# Altium PCB PowerBoard.PcbDoc
Units mm, origin at the board's own origin, x right, y up, seen from the top; angles counter-clockwise.
Board outline 36 x 20 mm, 4 copper layers (Top Layer, Layer 1, Layer 2, Bottom Layer), stack 0.888 mm thick; 25 components, 18 nets, 82 pads, 31 vias.
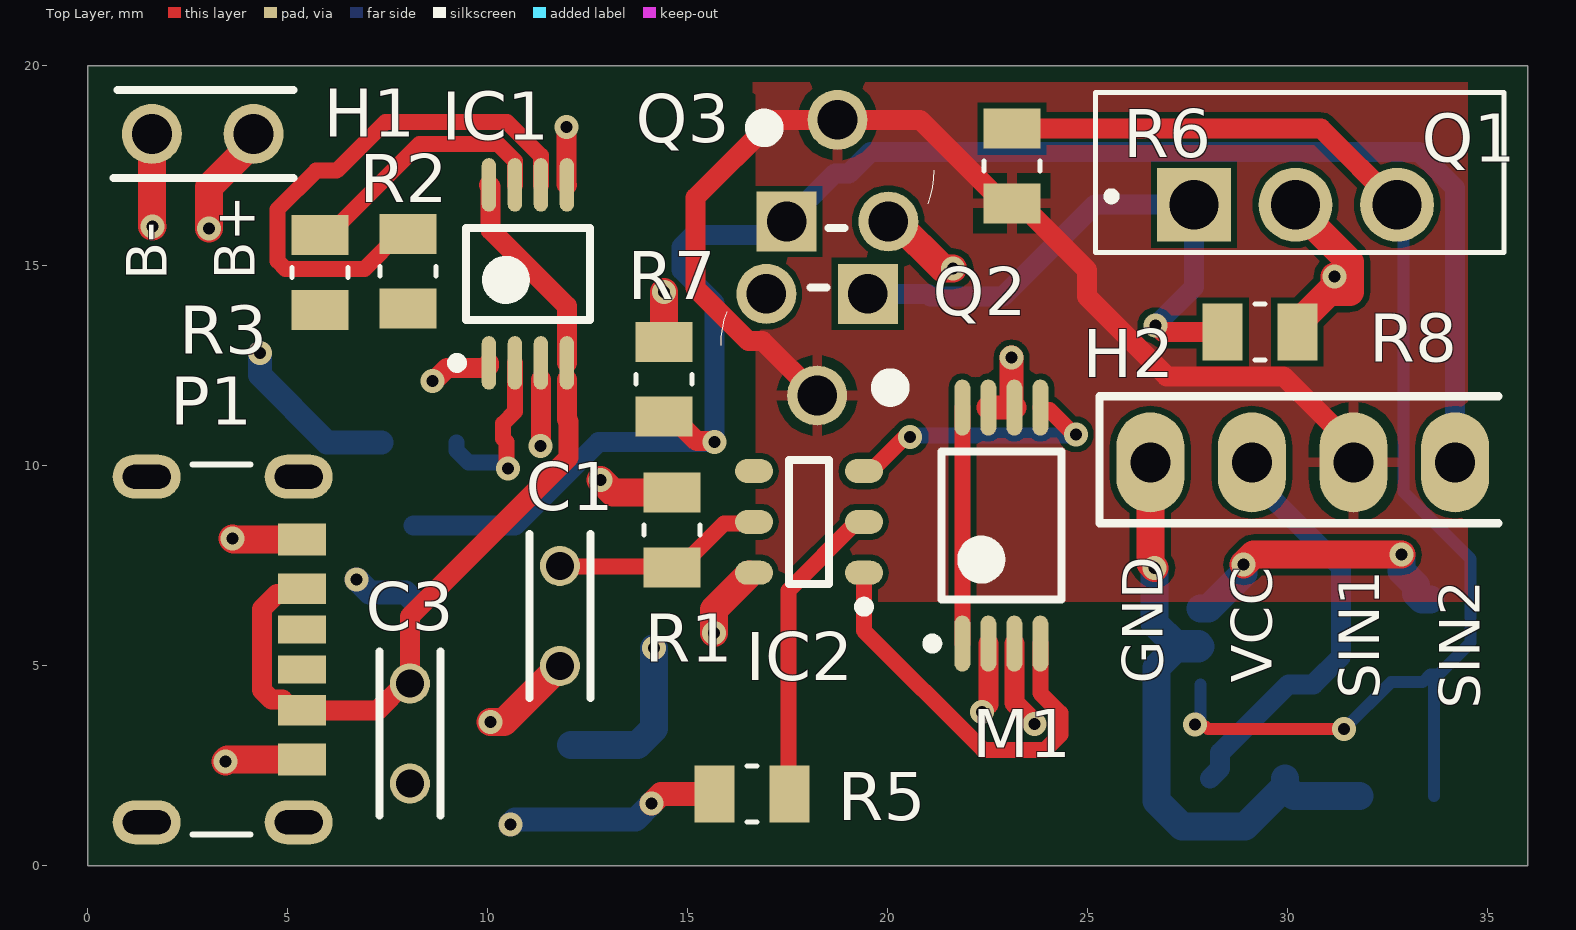
[diagram p0: Top Layer view]
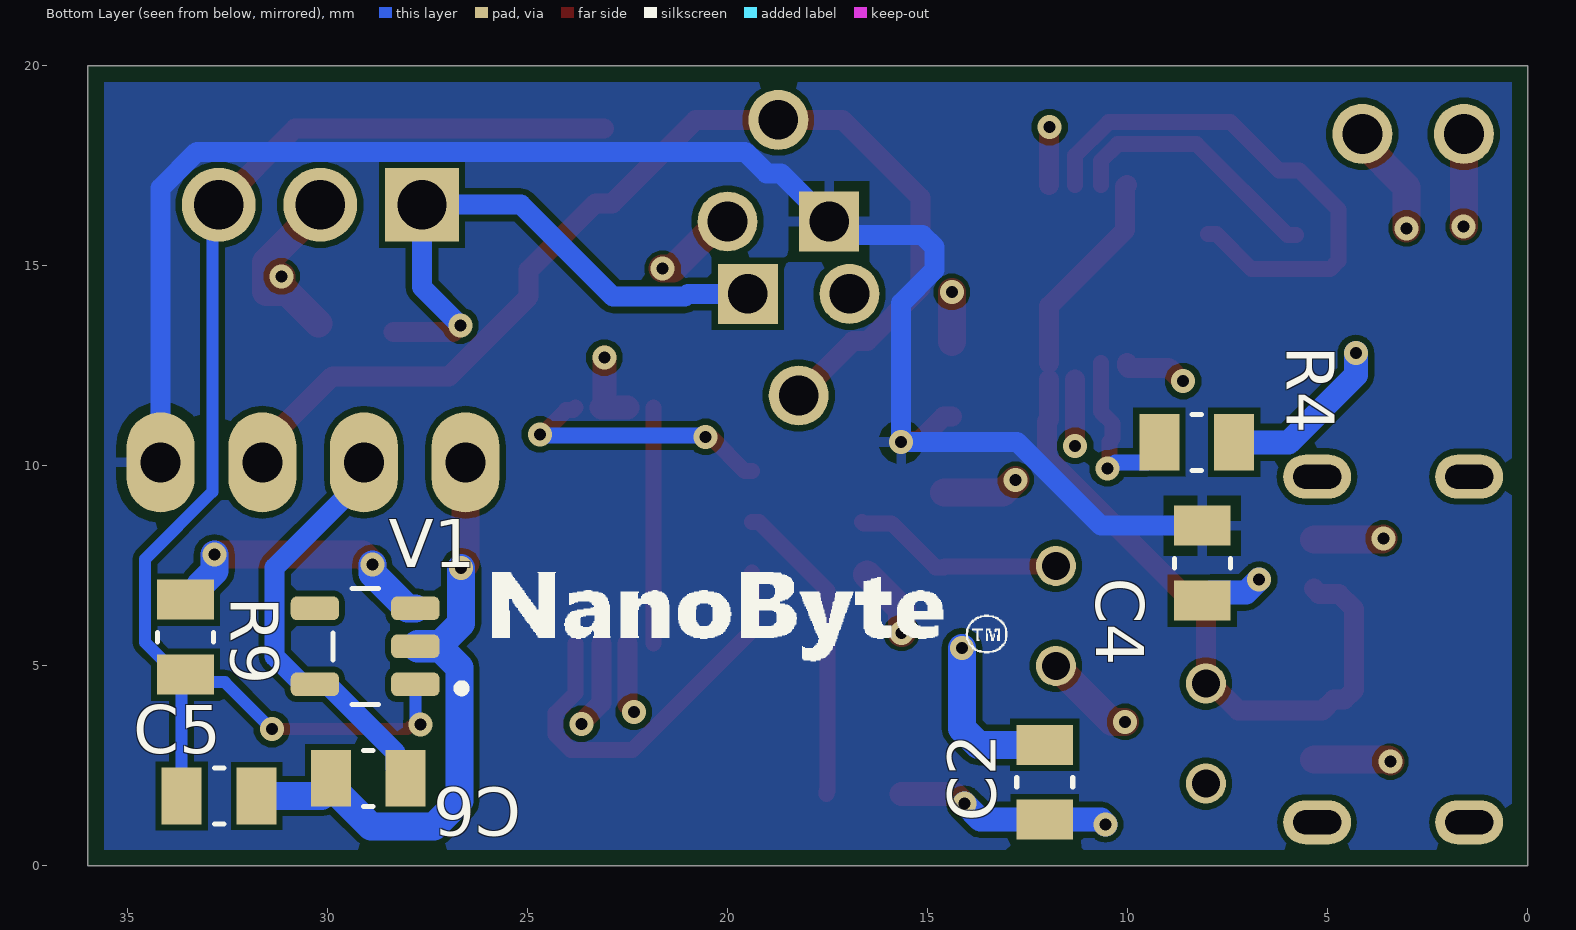
[diagram p1: Bottom Layer view, seen from below]
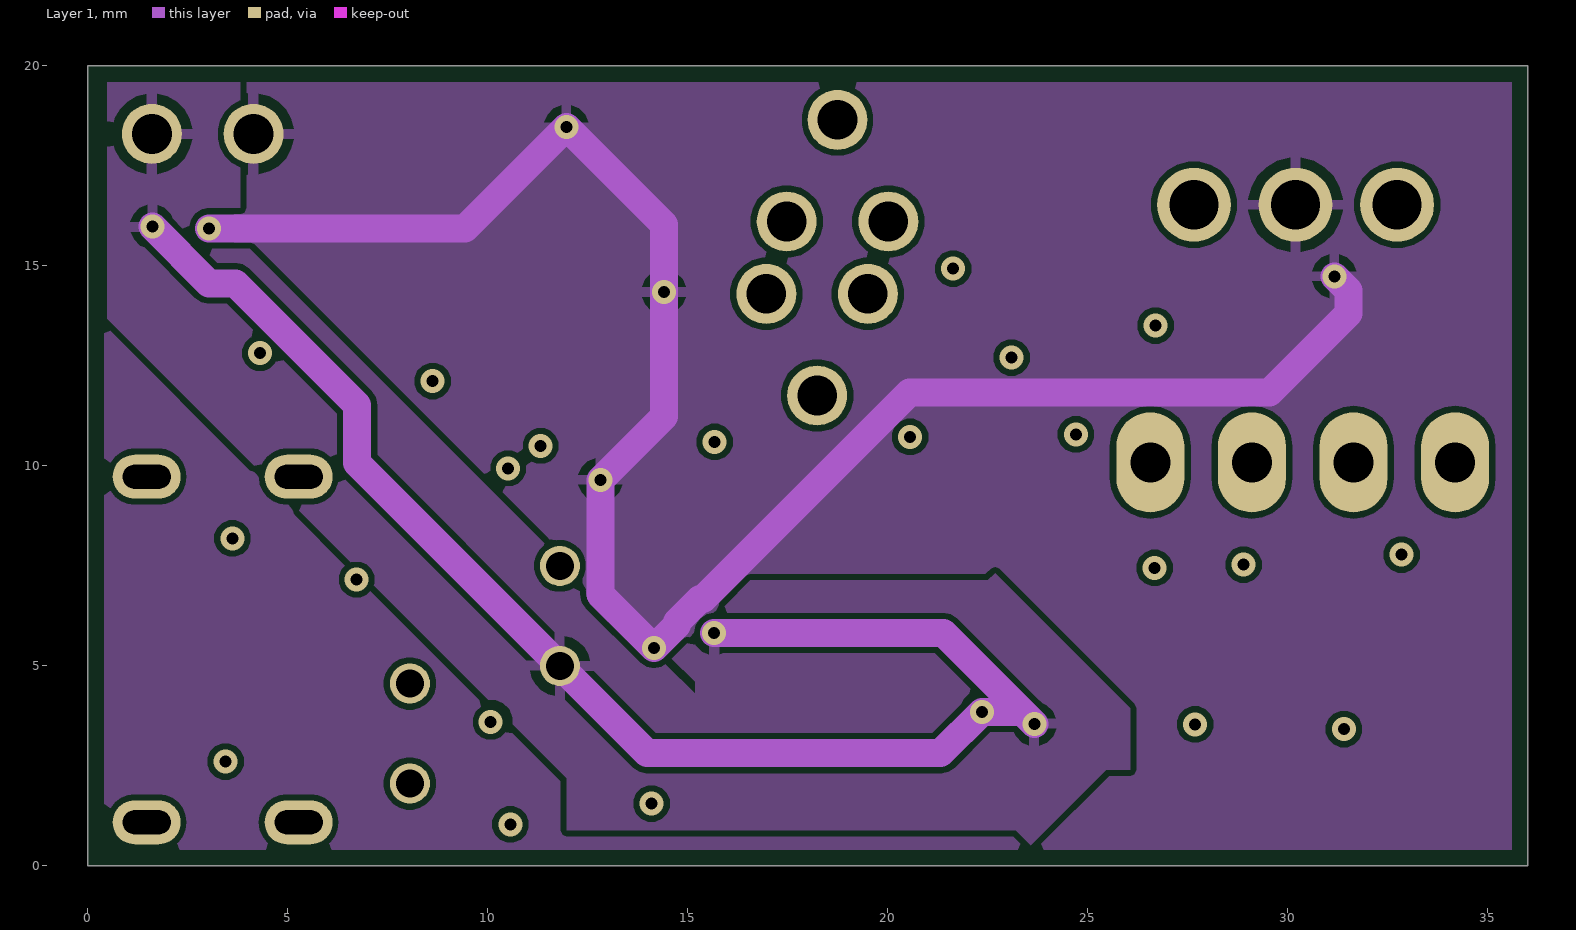
[diagram p2: Layer 1]
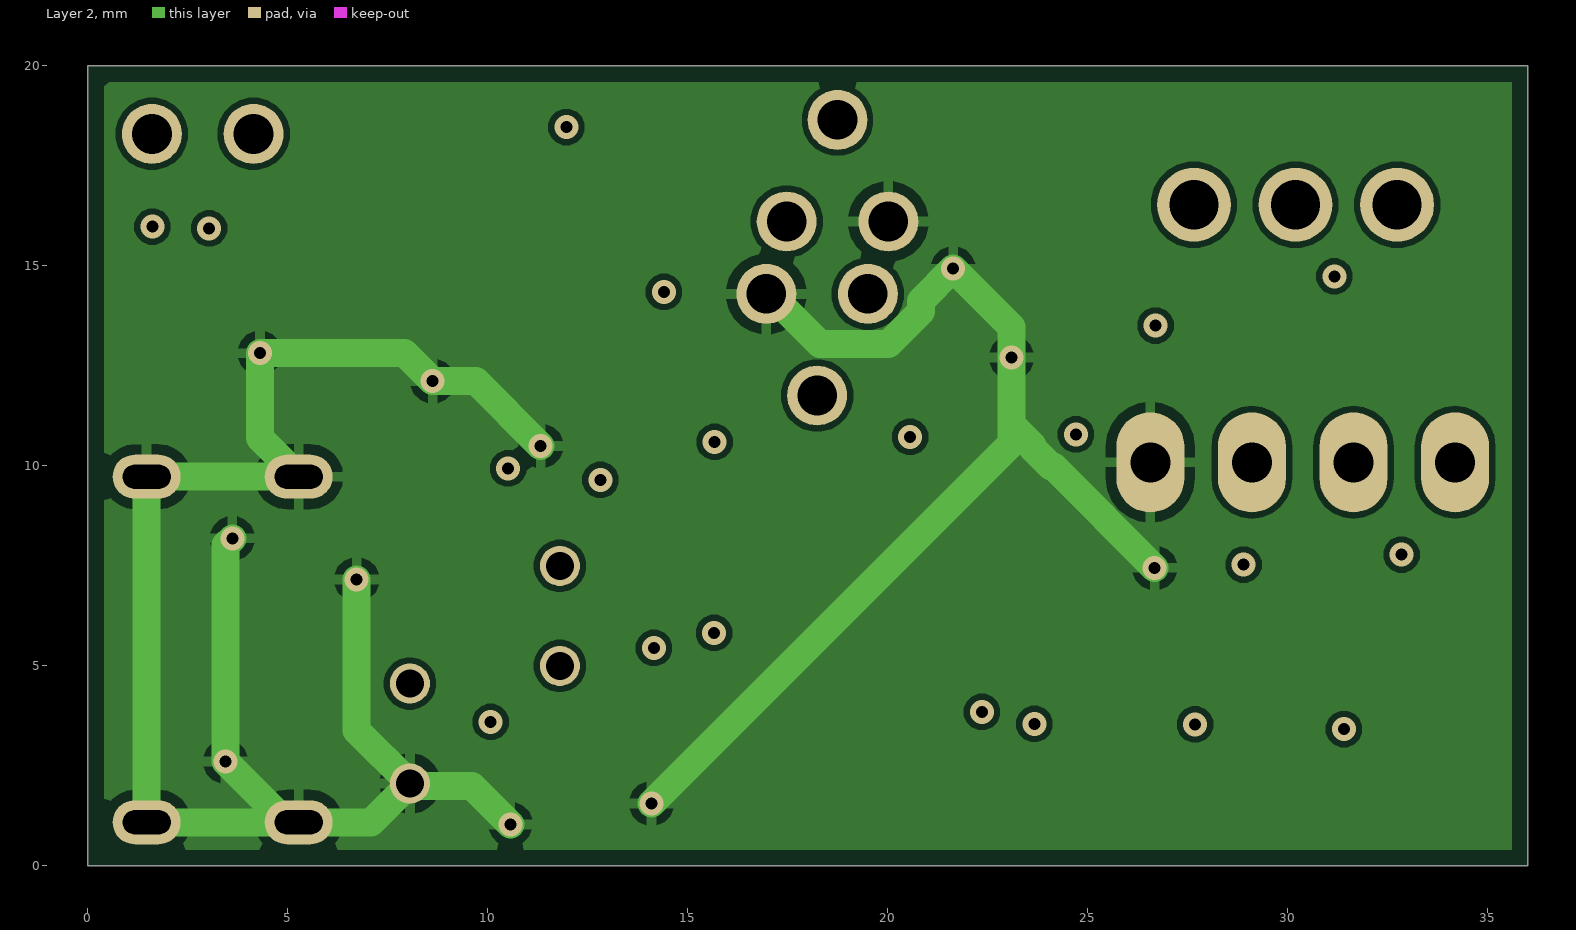
[diagram p3: Layer 2]
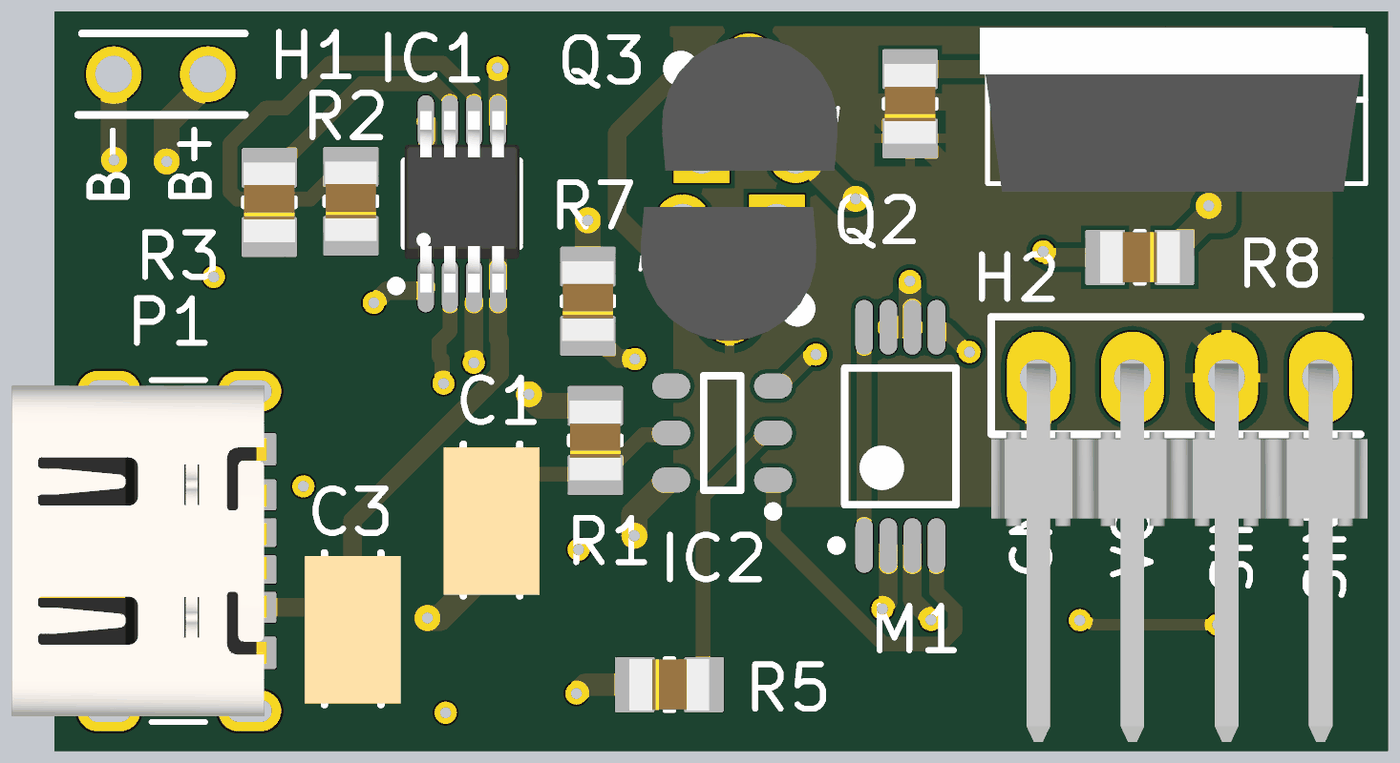
[diagram p4: 3D render of the assembled board from above, using the file's embedded part models]
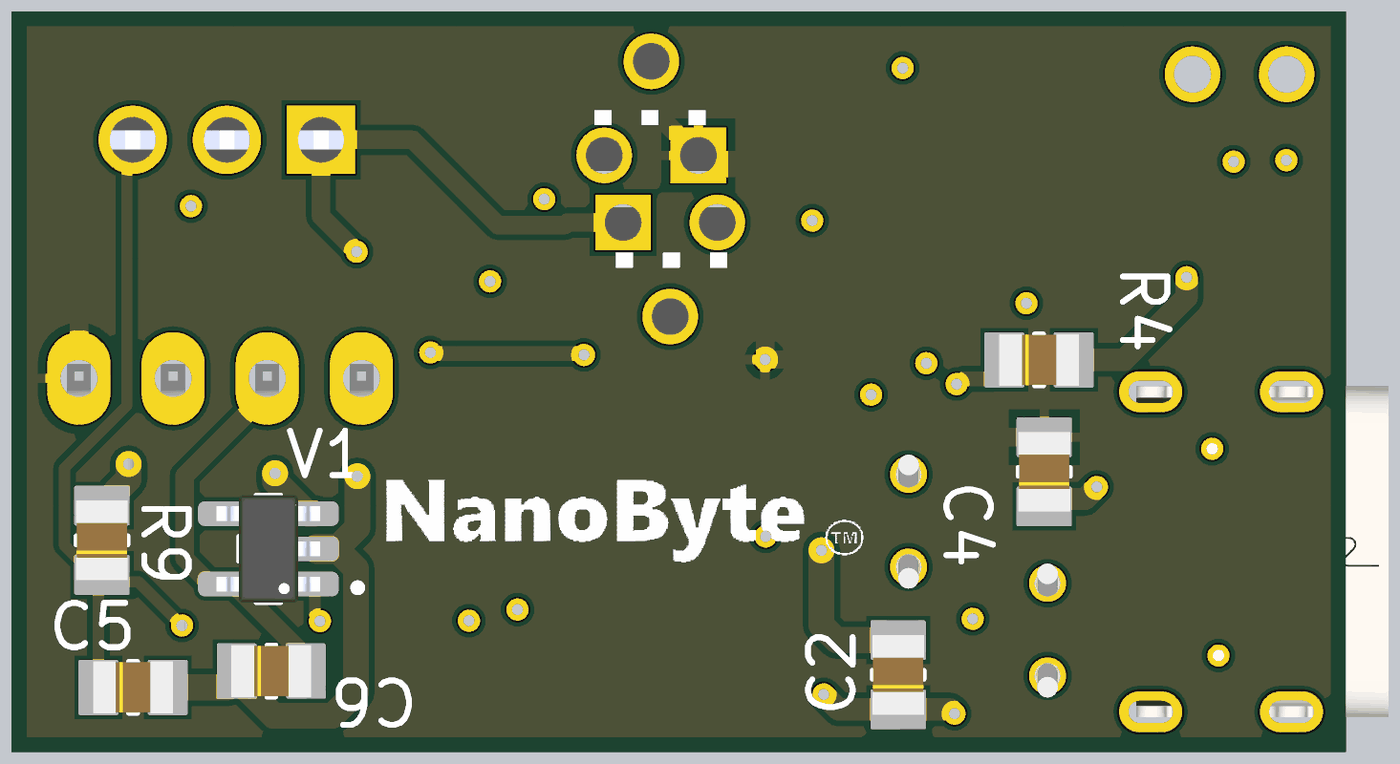
[diagram p5: 3D render of the assembled board from below, using the file's embedded part models]

## Layer stack, top to bottom
Top Solder: solder mask 0.0127, Solder Resist, Dk 3.8
Top Layer: signal copper 0.035
Dielectric 2: prepreg 0.0584, 2313, Dk 4.05
Layer 1: signal copper 0.018
Dielectric 1: dielectric 0.665, FR-4, Dk 4.5
Layer 2: signal copper 0.018
Dielectric 3: prepreg 0.0584, 2313, Dk 4.05
Bottom Layer: signal copper 0.035
Bottom Solder: solder mask 0.0127, Solder Resist, Dk 3.8

## Board outline
0,0 36,0 36,20 0,20

## Design rules (kind name [scope] priority, off if disabled: settings)
BoardOutlineClearance [All] p1: gap=0.4 ignorepadtopadclearanceinfootprint=FALSE
Clearance [All] p1: gap=0.15 ignorepadtopadclearanceinfootprint=FALSE
HoleSize [All] p1: absolutevalues=TRUE maxlimit=2.54 minlimit=0.05 maxpercent=80.000 minpercent=20.000
MinimumSolderMaskSliver [All] p1: minsoldermaskwidth=0.1
PasteMaskExpansion [All] p1: expansion=0.038
PlaneClearance [All] p1: clearance=0.3
PlaneConnect [All] p1: planeconnectstyle=Direct reliefexpansion=0.508 reliefentries=4 reliefconductorwidth=0.254 reliefairgap=0.254
PolygonConnect [All] p1: connectstyle=Relief reliefconductorwidth=0.254 reliefentries=4 polygonreliefangle="90 Angle" airgapwidth=0.254
RoutingVias [All] p1: holewidth=0.3 width=0.6 viastyle="Through Hole" minholewidth=0.15 minwidth=0.25 maxholewidth=0.711 maxwidth=0.7
SilkToSolderMaskClearance [IsPad] p1: minsilkscreentomaskgap=0.16 clearancetoexposedcopper=TRUE
SolderMaskExpansion [All] p1: expansion=0.05 istentingtop=FALSE
Width [All] p1: maxlimit=0.7 minlimit=0.16 preferedwidth=0.5 minimp=50.000000 maximp=50.000000 favimp=50.000000
24 further rules are at their usual default settings.

## Components (designator, comment, footprint, x,y, rotation, side; value= is the part's Value field where it differs from the comment)
C1 "0.1uf ceramic" CAPACITOR 11.8,5 r90 top value=100nF
C2 "10uf 0805" "0805 SMD" 12.08,2.09 r90 bottom value=10uF
C3 "0.1uf ceramic" CAPACITOR 8.05,2.06 r90 top value=100nF
C4 "22uf smd 0805" "0805 SMD" 8.14,7.57 r90 bottom value=22uF
C5 "22uf smd 0805" "0805 SMD" 32.72,1.75 r180 bottom value=22uF
C6 "22uf smd 0805" "0805 SMD" 28.99,2.19 r180 bottom value=22uF
H1 "2 pin female" "2 PIN FEMALE" 4.14,18.3 r270 top
H2 "4pin male" "4PIN HEADER MALE" 26.56,10.09 r90 top locked
IC1 "TP4056" "TP 4056" 11,14.8 r90 top
IC2 "DW01A" DW01 18.025,8.6 r180 top
M1 "FS8205A" FS8205A 22.835,8.51 r90 top
P1 "217175-0001" "USB TYPE C" -1.13,5.41 r270 top
Q1 "IRF5210STRLPBF" TO254P1041X444X1930-3 30.19,17.34 r0 top
Q2 "BC547B Transistor" TO127P254X732-3 16.96,11.76 r180 top
Q3 "BC547B Transistor" TO127P254X732-3 20.01,18.65 r0 top
R1 "100ohm smd 0805" "0805 SMD" 14.6,8.4 r90 top value=100R
R2 "1k ohm smd" "0805 SMD" 8,14.865 r90 top value=1kR
R3 "1k ohm smd" "0805 SMD" 5.8,14.835 r90 top value=1kR
R4 "1.2kohm smd" "0805 SMD" 8.28,10.59 r180 bottom
R5 "1k ohm smd" "0805 SMD" 16.6,1.8 r0 top value=1kR
R6 "100k smd 0805" "0805 SMD" 23.1,17.5 r90 top value=100kR
R7 "100k smd 0805" "0805 SMD" 14.4,12.165 r90 top value=100kR
R8 "100k smd 0805" "0805 SMD" 29.3,13.35 r180 top value=100kR
R9 "100k smd 0805" "0805 SMD" 33.56,5.72 r90 bottom value=100kR
V1 "TLV75733PDBVR" SOT95P280X145-5N 29.07,5.49 r0 bottom

## Footprints (in the part's own frame and the unit in brackets; to place one, negate y for a bottom-side part, rotate by r counter-clockwise, add the part's x,y. Pads: shape width x height; smd on the part's side, far side on the other; paste and mask are expansions set on the pad)
"2 PIN FEMALE" [mm]
  round 1.5 hole 1: 1(0,0) 2(0,-2.54)
  silkscreen extent -1.1,-3.5 1.1,1
"4PIN HEADER MALE" [mm]
  oval 2.5x1.7 hole 1: 1(0,0) 2(0,-2.54) 3(0,-5.08) 4(0,-7.62)
  silkscreen extent -1.52,-8.7 1.65,1.27, body extent -9.84,-8.89 0.38,1.27, height 2.42
"0805 SMD" [mm]
  rect 1x1.42 smd: 1(-0.935,0) 2(0.935,0)
  silkscreen extent -0.12,-0.7 0.12,0.7, body extent -1.07,-0.7 1.07,0.7, height 0.66
CAPACITOR [mm]
  round 1 hole 0.7: 1(0,0) 2(2.5,0)
  silkscreen extent -0.8,-0.76 3.3,0.76, body extent -0.77,-1.3 3.22,1.3, height 4.29
DW01 [mm] "SOIC, 6-Leads, Body 2.90x1.60mm, Pitch 1.27mm, IPC Medium Density"
  oval 0.95x0.6 smd: 1(-1.375,1.27) 2(-1.375,0) 3(-1.375,-1.27) 4(1.375,-1.27) 5(1.375,0) 6(1.375,1.27)
  silkscreen extent -1.5,-1.55 0.5,2.24, body extent -0.9,-1.55 0.9,1.55, height 1.45
FS8205A [mm] "TSOP, 8-Leads, Body 2.93x4.40mm, Pitch 0.65mm, IPC Medium Density"
  oval 1.4x0.4 smd mask+0.07: 1(-2.95,0.975) 2(-2.95,0.325) 3(-2.95,-0.325) 4(-2.95,-0.975) 5(2.95,-0.975) 6(2.95,-0.325) 7(2.95,0.325) 8(2.95,0.975)
  silkscreen extent -3.07,-1.5 1.85,1.85, body extent -2.25,-1.5 2.25,1.5, height 1.2
SOT95P280X145-5N [mm]
  rrect50% 1.21x0.59 smd: 1(-1.255,0.95) 2(-1.255,0) 3(-1.255,-0.95) 4(1.255,-0.95) 5(1.255,0.95)
  silkscreen extent -2.51,-1.45 0.8,1.45, body extent -1.4,-1.45 1.4,1.45, height 1.45
TO127P254X732-3 [mil]
  rect 59x59 / inner round 59 / far side rect 59x59 hole 39: 1(-100,-100)
  round 59 hole 39: 2(-50,0) 3(0,-100)
  silkscreen extent -126,-106 45,-4, body extent -142,-116 45,26, height 210
TO254P1041X444X1930-3 [mm]
  rect 1.845x1.845 / inner round 1.845 / far side rect 1.845x1.845 hole 1.23: 1(-2.54,-0.81)
  round 1.845 hole 1.23: 2(0,-0.81) 3(2.54,-0.81)
  silkscreen extent -5,-2 5.21,2, body extent -5.21,-2.22 5.21,2.22, height 19.3
"TP 4056" [mm]
  oval 1.34x0.36 smd mask+0.07: 1(-2.225,0.975) 2(-2.225,0.325) 3(-2.225,-0.325) 4(-2.225,-0.975) 5(2.225,-0.975) 6(2.225,-0.325) 7(2.225,0.325) 8(2.225,0.975)
  silkscreen extent -2.35,-1.55 1.15,1.9, body extent -2.4,-1.55 2.5,1.55, height 1.25
"USB TYPE C" [mm]
  rect 0.7x1.2 smd mask+0.064: A5(-0.5,6.48) B5(0.5,6.48)
  rect 0.76x1.2 smd mask+0.064: A9(1.52,6.48) B9(-1.52,6.48)
  rect 0.8x1.2 smd mask+0.064: A12(2.75,6.48) B12(-2.75,6.48)
  oval 1.1x1.7 hole 0.6 slot 1.2 at 90 deg mask+0.064: SH1(-4.32,2.6) SH2(4.32,2.6) SH3(-4.32,6.4) SH4(4.32,6.4)
  silkscreen extent -4.62,3.75 4.62,5.2, body extent -4.47,-0.01 4.47,6.86, height 3.22

## Part data
C1 C3: library part K104K15X7RF5TL2, "Ceramic Capacitor, Multilayer, Ceramic, 50V, 10% +Tol, 10% -Tol, X7R, 15% TC, 0.1uF, Through Hole Mount", Capacitor Type=Ceramic, Manufacturer="Vishay BCcomponents", Max Operating Temperature=125°C, Min Operating Temperature=-55°C, Package Shape=Rectangular, Package Style=RadialMeter, Rated DC Voltage (URdc)=50V, Supplier Part Number=594-K104K15X7RF5TL2, Temperature Characteristics Code=X7R, Tolerance  (fill in as +-)=10%, Category="Ceramic Capacitors", ComponentLink1Description=https://datasheet.ciiva.com:443/pdfs/VipMasterIC/IC/VISH/VISHS88539/VISHS88539-1.pdf?src-supplier=IHS+Markit, ComponentLink1URL=https://datasheet.ciiva.com:443/pdfs/VipMasterIC/IC/VISH/VISHS88539/VISHS88539-1.pdf?src-supplier=IHS+Markit, ComponentLink2Description=https://datasheet.ciiva.com/5711/5950-5711596.pdf?src-supplier=Farnell, ComponentLink2URL=https://datasheet.ciiva.com/5711/5950-5711596.pdf?src-supplier=Farnell, ComponentLink3Description=https://datasheet.ciiva.com/3777/kseries-3777922.pdf?src-supplier=Arrow+Electronics, ComponentLink3URL=https://datasheet.ciiva.com/3777/kseries-3777922.pdf?src-supplier=Arrow+Electronics, ComponentLink4Description=https://datasheet.ciiva.com/15165/getdatasheetpartid-35651-15165099.pdf?src-supplier=Verical, ComponentLink4URL=https://datasheet.ciiva.com/15165/getdatasheetpartid-35651-15165099.pdf?src-supplier=Verical, ComponentLink5Description=https://datasheet.ciiva.com/145/kseries-145889.pdf?src-supplier=Digikey, ComponentLink5URL=https://datasheet.ciiva.com/145/kseries-145889.pdf?src-supplier=Digikey, ComponentLink6Description=https://datasheet.ciiva.com/145/kseries-145890.pdf?src-supplier=Digikey, ComponentLink6URL=https://datasheet.ciiva.com/145/kseries-145890.pdf?src-supplier=Digikey, ComponentLink7Description=https://datasheet.ciiva.com/5390/mkseries-205465-5390374.pdf?src-supplier=Mouser, ComponentLink7URL=https://datasheet.ciiva.com/5390/mkseries-205465-5390374.pdf?src-supplier=Mouser, ComponentLink8Description=https://datasheet.ciiva.com/7974/5950-7974781.pdf?src-supplier=Element14, ComponentLink8URL=https://datasheet.ciiva.com/7974/5950-7974781.pdf?src-supplier=Element14, ComponentLink9Description=https://datasheet.ciiva.com/18446/70121924-18446217.pdf?src-supplier=Allied+Electronics, ComponentLink9URL=https://datasheet.ciiva.com/18446/70121924-18446217.pdf?src-supplier=Allied+Electronics, Dielectric Material=Ceramic, Height=5.58mm, JESD-609 Code=e3, Length=4mm, Manufacturer Part Number=K104K15X7RF5TL2, Mounting Technology="Through Hole", Multilayer=Yes, Packaging="Tape and Reel", Pins=2, Pricing="1=0.25, 10=0.134, 50=0.134, 100=0.093, 1000=0.066, 10000=0.048 (USD)", Reach SVHC Compliant=Yes, RoHS=Yes, RoHS Compliant=Yes, Stock=25637, Supplier=Mouser, Terminal Finish=Tin, Terminal Pitch=2.5mm, Termination=Wire, Tolerance (fill in as +-)=10%, Width=2.5mm
C2: library part GRM21BR61C106KE15K, "Ceramic Capacitor, Multilayer, Ceramic, 16V, 10% +Tol, 10% -Tol, X5R, 15% TC, 10uF, Surface Mount, 0805", Capacitor Type=Ceramic, Case/Package=0805, Manufacturer=Murata, Max Operating Temperature=85°C, Min Operating Temperature=-55°C, Package Shape=Rectangular, Package Style=SMTMeter, Rated DC Voltage (URdc)=16V, Supplier Part Number=81-GRM21BR61C106KE5K, Temperature Characteristics Code=X5R, Tolerance  (fill in as +-)=10%, Category="Ceramic Capacitors", ComponentLink1Description=https://psearch.en.murata.com:443/capacitor/product/GRM21BR61C106KE15%23.pdf?src-supplier=IHS+Markit, ComponentLink1URL=https://psearch.en.murata.com:443/capacitor/product/GRM21BR61C106KE15%23.pdf?src-supplier=IHS+Markit, ComponentLink2Description=https://datasheet.ciiva.com/26822/getdatasheetpartid-31687-26822939.pdf?src-supplier=Verical, ComponentLink2URL=https://datasheet.ciiva.com/26822/getdatasheetpartid-31687-26822939.pdf?src-supplier=Verical, ComponentLink3Description=https://datasheet.ciiva.com/5414/product-5414934.pdf?src-supplier=Mouser, ComponentLink3URL=https://datasheet.ciiva.com/5414/product-5414934.pdf?src-supplier=Mouser, ComponentLink4Description=https://datasheet.ciiva.com/6270/partnumbering-e-01-6270407.pdf?src-supplier=Digikey, ComponentLink4URL=https://datasheet.ciiva.com/6270/partnumbering-e-01-6270407.pdf?src-supplier=Digikey, ComponentLink5Description=https://datasheet.ciiva.com/6270/partnumbering-e-01-6270410.pdf?src-supplier=Digikey, ComponentLink5URL=https://datasheet.ciiva.com/6270/partnumbering-e-01-6270410.pdf?src-supplier=Digikey, ComponentLink6Description=https://datasheet.ciiva.com/6270/partnumbering-e-01-6270412.pdf?src-supplier=Digikey, ComponentLink6URL=https://datasheet.ciiva.com/6270/partnumbering-e-01-6270412.pdf?src-supplier=Digikey, Dielectric Material=Ceramic, Height=1.25mm, JESD-609 Code=e3, Length=2mm, Manufacturer Part Number=GRM21BR61C106KE15K, Mounting Technology="Surface Mount", Multilayer=Yes, Packaging="Tape and Reel", Pins=2, Pricing="1=0.14, 10=0.073, 50=0.073, 100=0.044, 1000=0.03, 10000=0.019 (USD)", Reach SVHC Compliant=Yes, RoHS=Yes, RoHS Compliant=Yes, Stock=207282, Supplier=Mouser, Terminal Finish=Nickel, Termination=Wraparound, Tolerance (fill in as +-)=10%, Width=1.25mm
C4 C5 C6: library part CL21A226KQCLRNC, "Ceramic Capacitor, Multilayer, Ceramic, 6.3V, 10% +Tol, 10% -Tol, X5R, 15% TC, 22uF, Surface Mount, 0805", Capacitor Type=Ceramic, Case/Package=0805, Manufacturer=Samsung, Max Operating Temperature=85°C, Min Operating Temperature=-55°C, Package Shape=Rectangular, Rated DC Voltage (URdc)=6.3V, Supplier Part Number=1276-6687-1-ND, Temperature Characteristics Code=X5R, Tolerance  (fill in as +-)=10%, Category="Ceramic Capacitors", ComponentLink1Description=https://datasheet.ciiva.com:443/pdfs/VipMasterIC/IC/SEMS/SEMS-S-A0008526420/SEMS-S-A0008526436-1.pdf?src-supplier=IHS+Markit, ComponentLink1URL=https://datasheet.ciiva.com:443/pdfs/VipMasterIC/IC/SEMS/SEMS-S-A0008526420/SEMS-S-A0008526436-1.pdf?src-supplier=IHS+Markit, ComponentLink2Description=http://www.samsungsem.com/kr/support/product-search/mlcc/CL21A226KQCLRNC.jsp?src-supplier=Digikey, ComponentLink2URL=http://www.samsungsem.com/kr/support/product-search/mlcc/CL21A226KQCLRNC.jsp?src-supplier=Digikey, ComponentLink3Description=https://datasheet.octopart.com/CL21A226KQCLRNC-Samsung-Electro-Mechanics-datasheet-110333968.pdf?src-supplier=Future+Electronics, ComponentLink3URL=https://datasheet.octopart.com/CL21A226KQCLRNC-Samsung-Electro-Mechanics-datasheet-110333968.pdf?src-supplier=Future+Electronics, Dielectric Material=Ceramic, JESD-609 Code=e3, Manufacturer Part Number=CL21A226KQCLRNC, Mounting Technology="Surface Mount", Multilayer=Yes, Packaging="Tape and Reel", Pins=2, Pricing="1=0.13, 10=0.074, 100=0.0448, 1000=0.02986 (USD)", Reach SVHC Compliant=Yes, RoHS=Yes, RoHS Compliant=Yes, Stock=1272424, Supplier=Digikey, Terminal Finish=Nickel, Termination=Wraparound, Tolerance (fill in as +-)=10%
H1: library part 22-02-2025, "Board Connector, 2 Contact(s), 1 Row(s), Female, Straight, 0.1 inch Pitch, Solder Terminal, Plug", Contact Resistance=20mR, Dielectric Withstanding Voltage (AC)=250V, Flammability Rating="UL94 V-0", Insulation Resistance=500GR, Manufacturer=Molex, Max Operating Temperature=105°C, Min Operating Temperature=-40°C, Rated Current (Signal)=2.5A, Supplier Part Number=538-22-02-2025, Board Mounting Option="PCB EDGE LOCKING HOOK", Body Breadth=0.318inch, Body Depth=0.31inch, Body Length=0.196inch, Body/Shell Style=PLUG, Category="Headers and Wire Housings", ComponentLink1Description=https://datasheet.ciiva.com:443/pdfs/VipMasterIC/IC/MOLE/MOLE-S-A0003536749/MOLE-S-A0003534645-1.pdf?src-supplier=IHS+Markit, ComponentLink1URL=https://datasheet.ciiva.com:443/pdfs/VipMasterIC/IC/MOLE/MOLE-S-A0003536749/MOLE-S-A0003534645-1.pdf?src-supplier=IHS+Markit, ComponentLink2Description=https://datasheet.ciiva.com/15175/getdatasheetpartid-31375-15175253.pdf?src-supplier=Verical, ComponentLink2URL=https://datasheet.ciiva.com/15175/getdatasheetpartid-31375-15175253.pdf?src-supplier=Verical, ComponentLink3Description=https://datasheet.ciiva.com/30151/52630022022025-pcb-receptacles-30151741.pdf?src-supplier=Onlinecomponents.com, ComponentLink3URL=https://datasheet.ciiva.com/30151/52630022022025-pcb-receptacles-30151741.pdf?src-supplier=Onlinecomponents.com, Connector Type="BOARD CONNECTOR", Contact Finish - Mating="NOT SPECIFIED", Contact Gender=Female, Contact Pattern=RECTANGULAR, Contact Style="BELLOWED TYPE", DIN Conformance=No, Durability=25Cycles, Filter Feature=No, IEC Conformance=No, Insertion Force-Max=2.502N, Insulation Material=Nylon, Manufacturer Part Number=22-02-2025, Mating Contact Pitch=0.1inch, Mating Information="MULTIPLE MATING PARTS AVAILABLE", MIL Conformance=No, Mixed Contacts=No, Mounting Style=STRAIGHT, Mounting Technology=Board, Number Of Connectors=1, Number of Contacts=2, Number Of PCB Rows=1, Number of Rows Loaded=1, Option="General Purpose", PCB Contact Pattern=RECTANGULAR, Pricing="1=0.28, 10=0.242, 50=0.206, 100=0.188, 1000=0.157, 10000=0.123 (USD)", Reach SVHC Compliant=Yes, Reference Standard=UL, Reliability=COMMERCIAL, RoHS=Yes, RoHS Compliant=Yes, Stock=7398, Supplier=Mouser, Terminal Length=0.133inch, Terminal Pitch=2.54mm, Termination=Solder, Withdrawl Force-Min=0.834N
H2: library part 10129379-904002BLF, "Conn Unshrouded Header HDR 4 POS 2.54mm Solder RA Thru-Hole Poly Bag", Manufacturer="Amphenol ICC / FCI", Supplier Part Number=10129379-904002BLF-ND, Category=Connectors, Manufacturer Part Number=10129379-904002BLF, Pricing="1=0.1, 10=0.087, 100=0.0739, 500=0.0659, 1000=0.06275, 5000=0.05601, 10000=0.05333 (USD)", RoHS=No, Stock=19049, Supplier=Digikey
IC1: library part TP4057, Manufacturer=Revvo, Supplier Part Number=5272-TP4057CT-ND, Manufacturer Part Number=TP4057, Pricing="1=0.45, 10=0.269, 25=0.2196, 100=0.1645, 250=0.13732, 500=0.1206, 1000=0.10656 (USD)", RoHS=No, Stock=1917, Supplier=Digikey
IC2: library part CDSOT236-0504C, "Trans Voltage Suppressor Diode, 5V V(RWM), Unidirectional, 1 Element, Silicon", Manufacturer=Bourns, Min Breakdown Voltage=6V, Package Body Material=Plastic, Package Shape=Rectangular, Package Style="SMALL OUTLINEMeter", Rep Pk Reverse Voltage-Max=5V, Supplier Part Number=CDSOT236-0504CCT-ND, Category="TVS Diodes", ComponentLink1Description=https://datasheet.ciiva.com:443/pdfs/VipMasterIC/IC/BOUR/BOUR-S-A0008954902/BOUR-S-A0008954902-1.pdf?src-supplier=IHS+Markit, ComponentLink1URL=https://datasheet.ciiva.com:443/pdfs/VipMasterIC/IC/BOUR/BOUR-S-A0008954902/BOUR-S-A0008954902-1.pdf?src-supplier=IHS+Markit, ComponentLink2Description=https://datasheet.ciiva.com/4510/cdsot236-0504c-29206-4510980.pdf?src-supplier=Mouser, ComponentLink2URL=https://datasheet.ciiva.com/4510/cdsot236-0504c-29206-4510980.pdf?src-supplier=Mouser, ComponentLink3Description=https://datasheet.ciiva.com/11193/cdsot236-0504c-11193748.pdf?src-supplier=Avnet, ComponentLink3URL=https://datasheet.ciiva.com/11193/cdsot236-0504c-11193748.pdf?src-supplier=Avnet, ComponentLink4Description=https://datasheet.ciiva.com/1281/1-1281335.pdf?src-supplier=Farnell, ComponentLink4URL=https://datasheet.ciiva.com/1281/1-1281335.pdf?src-supplier=Farnell, ComponentLink5Description=https://datasheet.ciiva.com/6574/cdsot236-0504c-6574181.pdf?src-supplier=Digikey, ComponentLink5URL=https://datasheet.ciiva.com/6574/cdsot236-0504c-6574181.pdf?src-supplier=Digikey, ComponentLink6Description=https://datasheet.ciiva.com/6574/cdsot236-0504c-6574182.pdf?src-supplier=Digikey, ComponentLink6URL=https://datasheet.ciiva.com/6574/cdsot236-0504c-6574182.pdf?src-supplier=Digikey, ComponentLink7Description=https://datasheet.ciiva.com/15186/getdatasheetpartid-569616-15186666.pdf?src-supplier=Verical, ComponentLink7URL=https://datasheet.ciiva.com/15186/getdatasheetpartid-569616-15186666.pdf?src-supplier=Verical, ComponentLink8Description=https://datasheet.ciiva.com/1276/1-1276716.pdf?src-supplier=Element14, ComponentLink8URL=https://datasheet.ciiva.com/1276/1-1276716.pdf?src-supplier=Element14, ComponentLink9Description=https://datasheet.ciiva.com/6574/cdsot236-0504c-6574183.pdf?src-supplier=Digikey, ComponentLink9URL=https://datasheet.ciiva.com/6574/cdsot236-0504c-6574183.pdf?src-supplier=Digikey, Diode Element Material=SILICON, Diode Type="TRANS VOLTAGE SUPPRESSOR", JESD-30 Code=R-PDSO-G6, JESD-609 Code=e3, Manufacturer Part Number=CDSOT236-0504C, Moisture Sensitivity Level=1, Number of Elements=1, Pins=6, Polarity=Unidirectional, Pricing="1=1.33, 10=1.05, 100=0.738, 500=0.569, 1000=0.549 (USD)", Qualification Status="Not Qualified", Reach SVHC Compliant=Yes, RoHS=Yes, RoHS Compliant=Yes, Stock=7352, Supplier=Digikey, Surface Mount=Yes, Technology=AVALANCHE, Terminal Finish=Tin, Terminal Form="Gull Wing", Terminal Position=DUAL
M1: library part FDMQ8205A, "Small Signal Field-Effect Transistor, 1.7A I(D), 4-Element, N-Channel and P-Channel, Silicon, Metal-oxide Semiconductor FET", Manufacturer="ON Semiconductor / Fairchild", Supplier Part Number=FDMQ8205AOSCT-ND, Category=Uncategorized, ComponentLink1Description=https://datasheet.ciiva.com:443/pdfs/VipMasterIC/IC/ONSM/ONSM-S-A0003590974/ONSM-S-A0003590675-1.pdf?src-supplier=IHS+Markit, ComponentLink1URL=https://datasheet.ciiva.com:443/pdfs/VipMasterIC/IC/ONSM/ONSM-S-A0003590974/ONSM-S-A0003590675-1.pdf?src-supplier=IHS+Markit, ComponentLink2Description=http://www.farnell.com/datasheets/2724479.pdf?src-supplier=Farnell, ComponentLink2URL=http://www.farnell.com/datasheets/2724479.pdf?src-supplier=Farnell, ComponentLink3Description=http://www.onsemi.com/pub/Collateral/FDMQ8205A-D.pdf?src-supplier=Digikey, ComponentLink3URL=http://www.onsemi.com/pub/Collateral/FDMQ8205A-D.pdf?src-supplier=Digikey, ComponentLink4Description=http://www.farnell.com/datasheets/2724479.pdf?src-supplier=Newark, ComponentLink4URL=http://www.farnell.com/datasheets/2724479.pdf?src-supplier=Newark, Manufacturer Part Number=FDMQ8205A, Pricing="1=4.3, 10=2.833, 100=2.0004, 500=1.64488, 1000=1.5307 (USD)", RoHS=Yes, Stock=2203, Supplier=Digikey
P1: "USB Type C - Connector, Top-mount, SMT, 6pos", Manufacturer=Molex, Category=Connectors, Manufacturer Part Number=217175-0001, Pricing="1=0.7777, 10=0.6391, 25=0.5562, 100=0.5234, 250=0.4834, 500=0.4331, 1000=0.3654, 4000=0.3393 (USD)", RoHS=No, Stock=4503, Supplier="Arrow Electronics", Supplier Part Number=217175-0001
Q1: "Power Field-Effect Transistor, 38A I(D), 100V, 0.06ohm, 1-Element, P-Channel, Silicon, Metal-oxide Semiconductor FET, TO-263AB", Avalanche Energy Rating (Eas)=120mJ, Case Connection=DRAIN, Drain Current-Max (Abs) (ID)=38A, Drain-source On Resistance-Max=60mR, DS Breakdown Voltage-Min=100V, Manufacturer=Infineon, Max Operating Temperature=150°C, Operating Mode="ENHANCEMENT MODE", Package Body Material=Plastic, Package Shape=Rectangular, Package Style="SMALL OUTLINEMeter", Peak Reflow Temperature (Cel)=260°C, Power Dissipation-Max (Abs)=170W, Pulsed Drain Current-Max (IDM)=140A, Supplier Part Number=942-IRF5210STRLPBF, Time @ Peak Reflow Temperature-Max (s)=30s, Category=MOSFETs, ComponentLink1Description=https://datasheet.ciiva.com:443/pdfs/VipMasterIC/IC/IRSD/IRSDS18784/IRSDS18784-1.pdf?src-supplier=IHS+Markit, ComponentLink1URL=https://datasheet.ciiva.com:443/pdfs/VipMasterIC/IC/IRSD/IRSDS18784/IRSDS18784-1.pdf?src-supplier=IHS+Markit, Drain Current-Max (ID)=38A, FET Technology="METAL-OXIDE SEMICONDUCTOR", JEDEC-95 Code=TO-263AB, JESD-30 Code=R-PSSO-G2, JESD-609 Code=e3, Manufacturer Part Number=IRF5210STRLPBF, Moisture Sensitivity Level=1, Number of Elements=1, Pins=2, Polarity/Channel Type=P-CHANNEL, Pricing="1=3.59, 10=1.86, 50=1.82, 100=1.69, 1000=1.34, 10000=1.33 (USD)", Qualification Status="Not Qualified", Reach SVHC Compliant=No, RoHS=Yes, RoHS Compliant=Yes, Stock=15276, Supplier=Mouser, Surface Mount=Yes, Terminal Finish=Nickel, Terminal Form="Gull Wing", Terminal Position=SINGLE, Transistor Application=SWITCHING, Transistor Element Material=SILICON
Q2 Q3: library part BC547B, "Small Signal Bipolar Transistor, 0.1A I(C), 45V V(BR)CEO, 1-Element, NPN, Silicon, TO-92", Manufacturer="ON Semiconductor / Fairchild", Supplier Part Number=BC547BFS-ND, Category=BJTs, Manufacturer Part Number=BC547B, Pricing="1=0.38, 10=0.234, 100=0.1472, 500=0.10944, 1000=0.09723, 2000=0.08693 (USD)", RoHS=Yes, RoHS Compliant=Yes, Stock=2396, Supplier=Digikey
R1: library part ERJ-6ENF1000V, "Fixed Resistor, Metal Glaze/thick Film, 0.125W, 100ohm, 150V, 1% +/-Tol, 100ppm/Cel, Surface Mount, 0805", Case/Package=0805, Manufacturer=Panasonic, Max Operating Temperature=155°C, Min Operating Temperature=-55°C, Package Height=0.6mm, Package Length=2mm, Package Shape=Rectangular, Package Width=1.25mm, Power=125mW, Rated Temperature=70°C, Resistor Type="FIXED RESISTOR", Supplier Part Number=667-ERJ-6ENF1000V, Temperature Coefficient (ppm/Cel)=100, Tolerance=1%, Working Voltage=150V, Category="Chip SMD Resistors", ComponentLink1Description=https://datasheet.ciiva.com:443/pdfs/VipMasterIC/IC/PANA/PANA-S-A0009889626/PANA-S-A0009889626-1.pdf?src-supplier=IHS+Markit, ComponentLink1URL=https://datasheet.ciiva.com:443/pdfs/VipMasterIC/IC/PANA/PANA-S-A0009889626/PANA-S-A0009889626-1.pdf?src-supplier=IHS+Markit, ComponentLink2Description=https://datasheet.ciiva.com/11808/0900766b80f80784-11808206.pdf?src-supplier=Rs, ComponentLink2URL=https://datasheet.ciiva.com/11808/0900766b80f80784-11808206.pdf?src-supplier=Rs, ComponentLink3Description=https://datasheet.ciiva.com/9186/aoa0000ce2-9186686.pdf?src-supplier=Avnet, ComponentLink3URL=https://datasheet.ciiva.com/9186/aoa0000ce2-9186686.pdf?src-supplier=Avnet, ComponentLink4Description=https://datasheet.ciiva.com/30154/aoa0000ce2-30154938.pdf?src-supplier=Onlinecomponents.com, ComponentLink4URL=https://datasheet.ciiva.com/30154/aoa0000ce2-30154938.pdf?src-supplier=Onlinecomponents.com, ComponentLink5Description=https://datasheet.ciiva.com/46419/1678782-46419878.pdf?src-supplier=Element14, ComponentLink5URL=https://datasheet.ciiva.com/46419/1678782-46419878.pdf?src-supplier=Element14, ComponentLink6Description=https://datasheet.ciiva.com/7830/426256-7830744.pdf?src-supplier=Element14, ComponentLink6URL=https://datasheet.ciiva.com/7830/426256-7830744.pdf?src-supplier=Element14, ComponentLink7Description=https://datasheet.ciiva.com/7830/1678782-7830986.pdf?src-supplier=Element14, ComponentLink7URL=https://datasheet.ciiva.com/7830/1678782-7830986.pdf?src-supplier=Element14, ComponentLink8Description=https://datasheet.ciiva.com/16765/70260748-16765594.pdf?src-supplier=Allied+Electronics, ComponentLink8URL=https://datasheet.ciiva.com/16765/70260748-16765594.pdf?src-supplier=Allied+Electronics, Construction=Rectangular, JESD-609 Code=e3, Manufacturer Part Number=ERJ-6ENF1000V, Mounting Technology="Surface Mount", Packaging="Tape and Reel", Pins=2, Pricing="1=0.11, 10=0.053, 50=0.053, 100=0.028, 1000=0.017, 10000=0.01 (USD)", Reach SVHC Compliant=Yes, Reference Standard=AEC-Q200, RoHS=Yes, RoHS Compliant=Yes, Stock=326427, Supplier=Mouser, Technology="METAL GLAZE/THICK FILM", Terminal Finish=Nickel, Termination=Wraparound
R2 R3 R5: library part RNCP0805FTD1K00, "Fixed Resistor, Thin Film, 0.25W, 1000ohm, 200V, 1% +/-Tol, 100ppm/Cel, Surface Mount, 0805", Case/Package=0805, Manufacturer="Stackpole Electronics", Max Operating Temperature=155°C, Min Operating Temperature=-55°C, Package Height=0.5mm, Package Length=2mm, Package Shape=Rectangular, Package Width=1.25mm, Power=250mW, Rated Temperature=70°C, Resistor Type="FIXED RESISTOR", Supplier Part Number=RNCP0805FTD1K00CT-ND, Temperature Coefficient (ppm/Cel)=100, Tolerance=1%, Working Voltage=200V, Additional Feature=ANTI-SULFUR, Category="Chip SMD Resistors", ComponentLink1Description=https://datasheet.ciiva.com:443/pdfs/VipMasterIC/IC/SEIE/SEIE-S-A0009893778/SEIE-S-A0009893778-1.pdf?src-supplier=IHS+Markit, ComponentLink1URL=https://datasheet.ciiva.com:443/pdfs/VipMasterIC/IC/SEIE/SEIE-S-A0009893778/SEIE-S-A0009893778-1.pdf?src-supplier=IHS+Markit, ComponentLink2Description=http://www.seielect.com/Catalog/SEI-rncp.pdf?src-supplier=Future+Electronics, ComponentLink2URL=http://www.seielect.com/Catalog/SEI-rncp.pdf?src-supplier=Future+Electronics, ComponentLink3Description=https://www.seielect.com/catalog/SEI-Packaging.pdf?src-supplier=Digikey, ComponentLink3URL=https://www.seielect.com/catalog/SEI-Packaging.pdf?src-supplier=Digikey, ComponentLink4Description=https://www.seielect.com/Catalog/SEI-rncp.pdf?src-supplier=Digikey, ComponentLink4URL=https://www.seielect.com/Catalog/SEI-rncp.pdf?src-supplier=Digikey, Construction=Chip, JESD-609 Code=e3, Manufacturer Part Number=RNCP0805FTD1K00, Mounting Technology="Surface Mount", Packaging="Tape and Reel", Pins=2, Pricing="1=0.1, 10=0.015, 50=0.013, 100=0.0101 (USD)", Reach SVHC Compliant=Yes, RoHS=Yes, RoHS Compliant=Yes, Stock=258243, Supplier=Digikey, Technology="THIN FILM", Terminal Finish=Nickel, Termination=Wraparound
R4: library part CRGCQ0805F1K2, "Fixed Resistor, Metal Glaze/thick Film, 0.125W, 1200ohm, 150V, 1% +/-Tol, 100ppm/Cel, Surface Mount, 0805", Manufacturer="TE Connectivity", Resistor Type="FIXED RESISTOR", Supplier Part Number=A129750CT-ND, Category="Chip SMD Resistors", ComponentLink1Description=https://datasheet.ciiva.com:443/pdfs/VipMasterIC/IC/TYEL/TYEL-S-A0009522825/TYEL-S-A0009524615-1.pdf?src-supplier=IHS+Markit, ComponentLink1URL=https://datasheet.ciiva.com:443/pdfs/VipMasterIC/IC/TYEL/TYEL-S-A0009522825/TYEL-S-A0009524615-1.pdf?src-supplier=IHS+Markit, ComponentLink2Description=https://4donline.ihs.com/images/VipMasterIC/IC/TYEL/TYEL-S-A0004929575/TYEL-S-A0004929575-1.pdf?hkey=52A5661711E402568146F3353EA87419&src-supplier=Farnell, ComponentLink2URL=https://4donline.ihs.com/images/VipMasterIC/IC/TYEL/TYEL-S-A0004929575/TYEL-S-A0004929575-1.pdf?hkey=52A5661711E402568146F3353EA87419&src-supplier=Farnell, ComponentLink3Description=http://datasheet.octopart.com/CRGCQ0805F1K2-TE-Connectivity-datasheet-114679081.pdf?src-supplier=Verical, ComponentLink3URL=http://datasheet.octopart.com/CRGCQ0805F1K2-TE-Connectivity-datasheet-114679081.pdf?src-supplier=Verical, ComponentLink4Description=http://datasheet.octopart.com/CRGCQ0805F1K2-TE-Connectivity-datasheet-114679081.pdf?src-supplier=Mouser, ComponentLink4URL=http://datasheet.octopart.com/CRGCQ0805F1K2-TE-Connectivity-datasheet-114679081.pdf?src-supplier=Mouser, ComponentLink5Description=http://datasheet.octopart.com/CRGCQ0805F1K2-TE-Connectivity-datasheet-114679081.pdf?src-supplier=Arrow+Electronics, ComponentLink5URL=http://datasheet.octopart.com/CRGCQ0805F1K2-TE-Connectivity-datasheet-114679081.pdf?src-supplier=Arrow+Electronics, ComponentLink6Description=http://datasheet.octopart.com/CRGCQ0805F1K2-TE-Connectivity-datasheet-114679081.pdf?src-supplier=Avnet, ComponentLink6URL=http://datasheet.octopart.com/CRGCQ0805F1K2-TE-Connectivity-datasheet-114679081.pdf?src-supplier=Avnet, ComponentLink7Description=http://datasheet.octopart.com/CRGCQ0805F1K2-TE-Connectivity-datasheet-114679081.pdf?src-supplier=Digikey, ComponentLink7URL=http://datasheet.octopart.com/CRGCQ0805F1K2-TE-Connectivity-datasheet-114679081.pdf?src-supplier=Digikey, ComponentLink8Description=https://www.te.com/commerce/DocumentDelivery/DDEController?Action=srchrtrv&DocNm=1773204-3&DocType=DS&DocLang=English&src-supplier=Digikey, ComponentLink8URL=https://www.te.com/commerce/DocumentDelivery/DDEController?Action=srchrtrv&DocNm=1773204-3&DocType=DS&DocLang=English&src-supplier=Digikey, ComponentLink9Description=http://datasheet.octopart.com/CRGCQ0805F1K2-TE-Connectivity-datasheet-114679081.pdf?src-supplier=Onlinecomponents.com, ComponentLink9URL=http://datasheet.octopart.com/CRGCQ0805F1K2-TE-Connectivity-datasheet-114679081.pdf?src-supplier=Onlinecomponents.com, ComponentLink10Description=http://datasheet.octopart.com/CRGCQ0805F1K2-TE-Connectivity-datasheet-114679081.pdf?src-supplier=Newark, ComponentLink10URL=http://datasheet.octopart.com/CRGCQ0805F1K2-TE-Connectivity-datasheet-114679081.pdf?src-supplier=Newark, ComponentLink11Description=https://4donline.ihs.com/images/VipMasterIC/IC/TYEL/TYEL-S-A0004929575/TYEL-S-A0004929575-1.pdf?hkey=52A5661711E402568146F3353EA87419&src-supplier=Newark, ComponentLink11URL=https://4donline.ihs.com/images/VipMasterIC/IC/TYEL/TYEL-S-A0004929575/TYEL-S-A0004929575-1.pdf?hkey=52A5661711E402568146F3353EA87419&src-supplier=Newark, ComponentLink12Description=http://datasheet.octopart.com/CRGCQ0805F1K2-TE-Connectivity-datasheet-114679081.pdf?src-supplier=Heilind+Electronics, ComponentLink12URL=http://datasheet.octopart.com/CRGCQ0805F1K2-TE-Connectivity-datasheet-114679081.pdf?src-supplier=Heilind+Electronics, ComponentLink13Description=https://datasheet.octopart.com/CRGCQ0805F1K2-TE-Connectivity-datasheet-114679081.pdf?src-supplier=Master+Electronics, ComponentLink13URL=https://datasheet.octopart.com/CRGCQ0805F1K2-TE-Connectivity-datasheet-114679081.pdf?src-supplier=Master+Electronics, ComponentLink14Description=http://datasheet.octopart.com/CRGCQ0805F1K2-TE-Connectivity-datasheet-114679081.pdf?src-supplier=TME, ComponentLink14URL=http://datasheet.octopart.com/CRGCQ0805F1K2-TE-Connectivity-datasheet-114679081.pdf?src-supplier=TME, ComponentLink15Description=http://datasheet.octopart.com/CRGCQ0805F1K2-TE-Connectivity-datasheet-114679081.pdf?src-supplier=Electro+Sonic, ComponentLink15URL=http://datasheet.octopart.com/CRGCQ0805F1K2-TE-Connectivity-datasheet-114679081.pdf?src-supplier=Electro+Sonic, ComponentLink16Description=http://datasheet.octopart.com/CRGCQ0805F1K2-TE-Connectivity-datasheet-114679081.pdf?src-supplier=Sager+Electronics, ComponentLink16URL=http://datasheet.octopart.com/CRGCQ0805F1K2-TE-Connectivity-datasheet-114679081.pdf?src-supplier=Sager+Electronics, ComponentLink17Description=http://datasheet.octopart.com/CRGCQ0805F1K2-TE-Connectivity-datasheet-114679081.pdf?src-supplier=Interstate+Connecting+Components, ComponentLink17URL=http://datasheet.octopart.com/CRGCQ0805F1K2-TE-Connectivity-datasheet-114679081.pdf?src-supplier=Interstate+Connecting+Components, Manufacturer Part Number=CRGCQ0805F1K2, Pins=2, Pricing="1=0.1, 10=0.037, 100=0.0186, 1000=0.01059, 2500=0.00902 (USD)", Reach SVHC Compliant=Yes, RoHS=Yes, RoHS Compliant=Yes, Stock=142199, Supplier=Digikey
R6 R7 R8 R9: library part RC0805FR-07100KL, "Fixed Resistor, Metal Glaze/thick Film, 0.125W, 100000ohm, 150V, 1% +/-Tol, 100ppm/Cel, Surface Mount, 0805", Case/Package=0805, Manufacturer=Yageo, Max Operating Temperature=155°C, Min Operating Temperature=-55°C, Package Height=0.5mm, Package Length=2mm, Package Shape=Rectangular, Package Width=1.25mm, Power=125mW, Rated Temperature=70°C, Resistor Type="FIXED RESISTOR", Supplier Part Number=2952521, Temperature Coefficient (ppm/Cel)=100, Tolerance=1%, Working Voltage=150V, Additional Feature="LASER TRIMMABLE", Category="Chip SMD Resistors", ComponentLink1Description=https://datasheet.ciiva.com:443/pdfs/VipMasterIC/IC/YAGO/YAGO-S-A0008145938/YAGO-S-A0008145938-1.pdf?src-supplier=IHS+Markit, ComponentLink1URL=https://datasheet.ciiva.com:443/pdfs/VipMasterIC/IC/YAGO/YAGO-S-A0008145938/YAGO-S-A0008145938-1.pdf?src-supplier=IHS+Markit, ComponentLink2Description=https://datasheet.ciiva.com/11808/0900766b8106beab-11808858.pdf?src-supplier=Rs, ComponentLink2URL=https://datasheet.ciiva.com/11808/0900766b8106beab-11808858.pdf?src-supplier=Rs, ComponentLink3Description=https://datasheet.ciiva.com/2457/pyu-r-int-thick-7-2457018.pdf?src-supplier=Digikey, ComponentLink3URL=https://datasheet.ciiva.com/2457/pyu-r-int-thick-7-2457018.pdf?src-supplier=Digikey, ComponentLink4Description=https://datasheet.ciiva.com/2457/pyu-r-int-thick-7-2457019.pdf?src-supplier=Digikey, ComponentLink4URL=https://datasheet.ciiva.com/2457/pyu-r-int-thick-7-2457019.pdf?src-supplier=Digikey, ComponentLink5Description=https://datasheet.ciiva.com/2457/pyu-r-int-thick-7-2457017.pdf?src-supplier=Digikey, ComponentLink5URL=https://datasheet.ciiva.com/2457/pyu-r-int-thick-7-2457017.pdf?src-supplier=Digikey, ComponentLink6Description=https://datasheet.ciiva.com/12667/rc0805-12667001.pdf?src-supplier=Mouser, ComponentLink6URL=https://datasheet.ciiva.com/12667/rc0805-12667001.pdf?src-supplier=Mouser, ComponentLink7Description=https://datasheet.ciiva.com/7941/1697719-7941676.pdf?src-supplier=Element14, ComponentLink7URL=https://datasheet.ciiva.com/7941/1697719-7941676.pdf?src-supplier=Element14, ComponentLink8Description=https://datasheet.ciiva.com/7941/1686128-7941677.pdf?src-supplier=Element14, ComponentLink8URL=https://datasheet.ciiva.com/7941/1686128-7941677.pdf?src-supplier=Element14, ComponentLink9Description=https://datasheet.ciiva.com/7660/38627-7660796.pdf?src-supplier=Element14, ComponentLink9URL=https://datasheet.ciiva.com/7660/38627-7660796.pdf?src-supplier=Element14, ComponentLink10Description=https://datasheet.ciiva.com/22747/444164-22747534.pdf?src-supplier=Element14, ComponentLink10URL=https://datasheet.ciiva.com/22747/444164-22747534.pdf?src-supplier=Element14, ComponentLink11Description=https://datasheet.ciiva.com/7941/1697719-7941678.pdf?src-supplier=Element14, ComponentLink11URL=https://datasheet.ciiva.com/7941/1697719-7941678.pdf?src-supplier=Element14, ComponentLink12Description=https://datasheet.ciiva.com/16747/rc0805-16747226.pdf?src-supplier=Future+Electronics, ComponentLink12URL=https://datasheet.ciiva.com/16747/rc0805-16747226.pdf?src-supplier=Future+Electronics, Construction=Chip, JESD-609 Code=e3, Manufacturer Part Number=RC0805FR-07100KL, Mounting Technology="Surface Mount", Packaging="Tape and Reel", Pins=2, Pricing="5000=0.0016, 25000=0.0015, 100000=0.0015, 250000=0.0014, 625000=0.0014 (USD)", Reach SVHC Compliant=Yes, RoHS=Yes, RoHS Compliant=Yes, Stock=1365000, Supplier="Future Electronics", Technology="METAL GLAZE/THICK FILM", Terminal Finish=Nickel, Termination=Wraparound
V1: "Fixed Positive LDO Regulator, 3.3V, 0.475V Dropout, PDSO5", Manufacturer="Texas Instruments", Supplier Part Number=595-TLV75733PDBVR, Category="Voltage Regulators - Linear", ComponentLink1Description=https://www.ti.com:443/lit/ds/symlink/tlv757p.pdf?src-supplier=IHS+Markit, ComponentLink1URL=https://www.ti.com:443/lit/ds/symlink/tlv757p.pdf?src-supplier=IHS+Markit, ComponentLink2Description=http://www.ti.com/lit/ds/symlink/tlv757p.pdf?src-supplier=Digikey, ComponentLink2URL=http://www.ti.com/lit/ds/symlink/tlv757p.pdf?src-supplier=Digikey, JESD-609 Code=e3, Manufacturer Part Number=TLV75733PDBVR, Moisture Sensitivity Level=1, Pricing="1=0.29, 10=0.196, 50=0.174, 100=0.15, 1000=0.125, 10000=0.11 (USD)", Reach SVHC Compliant=Yes, Regulator Type="FIXED POSITIVE SINGLE OUTPUT LDO REGULATOR", RoHS=Yes, RoHS Compliant=Yes, Stock=11229, Supplier=Mouser, Terminal Finish=Tin

## Via types
v1: diameter 0.6, hole 0.3, Top Layer to Bottom Layer, 31 vias

## Nets (pads, with @x,y where several pads share a name; then routed paths per layer and width w, separated by ;. In a path a pad name is that pad's centre, name@x,y a point inside that pad or via, vN(x,y) a via of type N, cw(c..) or ccw(c..) an arc to the next point about the centre after c; other vN are vias at no path point)
B-: C1.1 H1.2 IC2.6 M1.2 M1.3 | length 47.9
  Top Layer w0.5: v1(22.35,3.85) 22.35,3.877 22.51,4.037 M1.2 ; M1.3 23.16,4.077 23.66,3.577 v1(23.66,3.55)
  Top Layer w0.7: H1.2 1.6,15.99 v1(1.61,15.98) ; v1(10.07,3.6) 10.4,3.6 C1.1@11.8,5 ; v1(15.656,5.824) 15.652,5.828 15.652,6.407 IC2.6@16.525,7.28
  Layer 1 w0.7: v1(1.61,15.98) 3.024,14.566 3.686,14.566 6.732,11.519 6.732,10.068 11.8,5 13.98,2.82 21.32,2.82 v1(22.35,3.85) 23.36,3.85 ; v1(15.656,5.824) 21.386,5.824 23.36,3.85 ; v1(23.66,3.55) 23.36,3.85
MainGND: C2.1 C3.1 C4.1 C5.2 C6.1 H2.1 IC1.1 IC1.3 M1.6 M1.7 P1.A12 P1.B12 P1.SH1 P1.SH2 P1.SH3 P1.SH4 Q2.3 Q3.3 R4.2 R5.1 V1.2 | length 115
  Top Layer w0.5: v1(8.62,12.12) 8.647,12.12 8.98,12.453 9.98,12.453 10.025,12.498 IC1.1 ; v1(11.32,10.5) 11.325,10.505 11.325,11.155 IC1.3@11.325,12.155
  Top Layer w0.6: v1(14.09,1.56) 14.33,1.8 R5.1 ; M1.7 M1.6 23.09,11.53 v1(23.09,12.71)
  Top Layer w0.7: v1(3.44,2.61) 3.49,2.66 P1.A12 ; v1(3.61,8.19) 3.64,8.16 P1.B12 ; Q3.3 20.195,16.11 21.375,14.93 v1(21.63,14.93) ; H2.1 26.56,7.56 v1(26.67,7.45)
  Layer 2 w0.7: v1(3.61,8.19) 3.44,8.02 v1(3.44,2.61) 4.96,1.09 P1.SH4 ; P1.SH3@5.078,9.73 4.893,9.915 4.893,10.107 4.3,10.7 v1(4.3,12.82) 7.92,12.82 v1(8.62,12.12) 9.7,12.12 v1(11.32,10.5) ; P1.SH3 P1.SH1 P1.SH2 P1.SH4 ; v1(6.72,7.16) 6.72,3.39 C3.1 ; v1(10.56,1.04) 9.597,2.003 8.107,2.003 C3.1 ; v1(14.09,1.56) 23.09,10.56 23.09,11.03 ; Q2.3 Q2.3@16.96,14.345 ; Q2.3@17.005,14.345 18.299,13.051 20.017,13.051 20.824,13.857 20.824,14.124 v1(21.63,14.93) 23.09,13.47 v1(23.09,12.71) 23.09,11.03 ; v1(26.67,7.45) 24.14,9.98 24.079,9.98 23.61,10.449 23.61,10.51 23.09,11.03 ; P1.SH4 7.08,1.09 C3.1
  Bottom Layer w0.6: v1(4.3,12.82) 4.3,12.27 5.98,10.59 R4.2 ; v1(6.72,7.16) 7.045,6.835 7.94,6.835 C4.1 ; v1(10.56,1.04) 10.675,1.155 13.685,1.155 v1(14.09,1.56)
  Bottom Layer w0.7: v1(26.67,7.45) 26.67,6.064 27.189,5.545 27.76,5.545 V1.2 27.76,5.435 27.189,5.435 26.71,4.956 26.71,1.618 27.348,0.98 28.925,0.98 C6.1@29.925,1.98 ; C6.1 C6.1@29.925,1.98 ; C5.2 30.155,1.75 C6.1@29.925,1.98
MainPower+: C2.2 H1.1 IC1.5 Q1.2 R1.2 R7.2 R8.1 | length 63.6
  Top Layer w0.5: v1(11.96,18.47) 11.968,18.462 11.968,17.033 IC1.5
  Top Layer w0.7: v1(3.031,15.941) 3.031,16.974 4.14,18.084 H1.1 ; v1(12.81,9.65) 13.125,9.335 R1.2 ; R7.2 v1(14.4,14.35) ; Q1.2 30.19,16.46 31.55,15.1 31.55,14.35 31.159,14.35 ; R8.1@30.235,13.56 31.025,14.35 31.159,14.35 ; v1(31.159,14.741) 31.159,14.35
  Layer 1 w0.7: v1(3.031,15.941) 9.43,15.94 v1(11.96,18.47) 14.4,16.03 v1(14.4,14.35) 14.4,11.24 v1(12.81,9.65) 12.81,6.79 v1(14.15,5.45) 14.727,6.027 14.727,6.098 15.304,6.674 15.374,6.674 20.54,11.84 29.54,11.84 31.51,13.81 31.51,14.39 v1(31.159,14.741)
  Bottom Layer w0.7: C2.2 13.74,3.025 14.15,3.435 v1(14.15,5.45)
NetC1_2: C1.2 IC2.5 R1.1 | length 5.3
  Top Layer w0.4: C1.2 11.818,7.482 14.582,7.482 R1.1 14.81,7.465 15.907,8.562 16.612,8.562 IC2.5
NetC3_2: C3.2 IC1.4 IC1.8 P1.A9 P1.B9 | length 21.9
  Top Layer w0.5: P1.B9 5.22,6.8 4.724,6.8 4.35,6.426 4.35,4.394 4.584,4.16 4.86,4.16 5.13,3.89 5.35,3.89 7.245,3.89 7.915,4.56 C3.2 8.05,6.24 12.02,10.21 12.02,11.11 11.975,11.155 IC1.4@11.975,12.155 ; IC1.8 10.07,16.98 10.07,15.9 11.975,13.995 IC1.4
NetC5_1: C5.1 Q1.3 R6.2 R9.1 V1.1 | length 34
  Top Layer w0.3: v1(27.68,3.54) 27.737,3.483 27.943,3.483 28.006,3.42 v1(31.4,3.42)
  Top Layer w0.5: R6.2 30.825,18.435 Q1.3
  Bottom Layer w0.3: v1(27.68,3.54) 27.815,3.675 V1.1 ; v1(31.4,3.42) 32.576,4.596 33.371,4.596 R9.1 33.77,4.785 34.57,5.585 34.57,7.674 32.89,9.354 32.89,16.37 Q1.3 ; C5.1 R9.1@33.655,4.69
NetIC1_2: IC1.2 R4.1 | length 4.5
  Top Layer w0.4: v1(10.504,9.937) 10.466,9.975 10.466,10.595 10.381,10.68 10.381,11.06 10.675,11.354 IC1.2
  Bottom Layer w0.4: R4.1 9.215,10.38 9.515,10.08 10.307,10.08 10.45,9.937 v1(10.504,9.937)
NetIC1_6: IC1.6 R2.2 | length 13.6
  Top Layer w0.4: R2.2 7.79,15.8 6.91,14.92 4.945,14.92 4.74,15.125 4.74,16.415 5.705,17.38 6.22,17.38 7.435,18.595 10.483,18.595 11.323,17.755 11.323,17.027 IC1.6
NetIC1_7: IC1.7 R3.2 | length 6.6
  Top Layer w0.4: R3.2 6.01,15.77 8.285,18.045 10.255,18.045 10.673,17.627 10.673,17.027 IC1.7
NetIC2_1: IC2.1 M1.4 | length 10.2
  Top Layer w0.4: IC2.1 19.4,5.881 22.381,2.9 23.929,2.9 24.31,3.281 24.31,3.819 23.81,4.319 M1.4
NetIC2_2: IC2.2 R5.2 | length 7.7
  Top Layer w0.4: R5.2 17.535,1.856 17.516,1.876 17.516,6.891 19.225,8.6 IC2.2
NetIC2_3: IC2.3 M1.5 | length 6.8
  Top Layer w0.4: IC2.3 19.575,9.87 20.391,10.686 20.517,10.686 v1(20.556,10.724) ; M1.5 23.876,11.394 24.042,11.394 24.646,10.79 v1(24.7,10.79)
  Bottom Layer w0.4: v1(20.556,10.724) 20.589,10.757 24.667,10.757 v1(24.7,10.79)
NetM1_1: M1.1 M1.8 | length 5.9
  Top Layer w0.4: M1.1 M1.8
NetQ1_1: Q1.1 Q2.1 R8.2 | length 14.3
  Top Layer w0.5: v1(26.69,13.51) 26.717,13.51 26.877,13.35 R8.2
  Bottom Layer w0.5: Q2.1 20.999,14.3 21.069,14.23 22.873,14.23 25.173,16.53 Q1.1 27.65,14.47 v1(26.69,13.51)
NetR9_2: R9.2 V1.3 | length 7.3
  Top Layer w0.7: v1(28.89,7.53) 29.14,7.78 v1(32.84,7.78)
  Bottom Layer w0.7: V1.3 28.015,6.44 28.89,7.315 v1(28.89,7.53) ; v1(32.84,7.78) 32.84,7.375 33.2,7.015 33.2,6.805 33.35,6.655 R9.2
POUT: C6.2 H2.2 V1.5 | length 10.5
  Bottom Layer w0.5: C6.2 28.305,2.44 28.305,2.83 30.015,4.54 V1.5 30.635,4.54 31.33,5.235 31.33,7.46 29.1,9.69 H2.2
SIN1: H2.3 Q2.2 Q3.2 R6.1 | length 27.8
  Top Layer w0.5: Q2.2 16.867,13.123 16.512,13.123 15.19,14.445 15.19,16.71 17.13,18.65 20.805,18.65 22.89,16.565 R6.1 23.31,16.565 24.98,14.895 24.98,14.23 26.97,12.24 29.89,12.24 31.64,10.49 H2.3
SIN2: C4.2 H2.4 Q3.1 R7.1 | length 42.7
  Top Layer w0.5: R7.1 14.61,11.23 15.221,10.619 15.651,10.619 v1(15.67,10.6)
  Bottom Layer w0.5: C4.2 10.675,8.505 12.77,10.6 v1(15.67,10.6) 15.67,14.07 14.84,14.9 14.84,15.477 15.133,15.77 17.13,15.77 18.676,17.316 19.032,17.316 19.568,17.852 32.182,17.852 33.278,17.852 34.18,16.95 H2.4
pads on no net: IC2.4 P1.A5 P1.B5 R2.1 R3.1 V1.4

## Polygon pours and split planes (outlines as drawn)
MainPower+ on Layer 1 "MAINPOWER+_L02_P007" (solid, pour order 7): 0.3,19.7 35.55,19.7 35.59,19.74 35.66,19.67 35.66,0.1 0.48,0.1 0.29,0.29 0.375,0.375 0.375,19.635
B- on Layer 1 "B-_L02_P006" (solid, pour order 6): 0.27,19.67 0.3,19.7 3.81,19.7 3.81,15.67 15.18,4.3 15.18,4.6 14.53,5.25 14.74,5.46 14.74,7.14 22.5,7.14 22.68,7.32 26.06,3.94 26.06,2.41 25.46,2.41 23.57,0.52 23.2,0.89 11.97,0.89 11.97,2.19 0.48,13.68 0.48,19.6
SIN1 on Top Layer "SIN1_L01_P003" (solid, pour order 3): 16.7,19.28 16.7,7.49 17.59,6.6 34.5,6.6 34.5,19.8 34.47,19.77 16.62,19.77 16.62,19.23
SIN2 on Bottom Layer "SIN2_L04_P008" (solid, pour order 8): 0.2,19.79 35.61,19.79 35.87,19.53 35.87,0.22 0.38,0.22 0.18,0.42 0.18,19.77
MainGND on Layer 2 "MAINGND_L03_P005" (solid, pour order 5): 0.25,19.65 0.27,19.67 35.61,19.67 35.61,0.38 35.75,0.24 0.41,0.24 0.41,19.49 0.27,19.63

## Silkscreen, mask and mechanical layers (free items; w line width, h text height)
Top Overlay:
  text "B+" at 4.17,14.66 h1.02 r90
  text "B-" at 1.97,14.64 h1.02 r90
  text "GND" at 26.87,4.56 h1.02 r90
  text "VCC" at 29.6,4.58 h1.02 r90
  text "SIN1" at 32.28,4.18 h1.02 r90
  text "SIN2" at 34.8,3.93 h1.02 r90
Bottom Overlay:
  drawing of 13 lines, arcs and shapes, not listed

## Text inside footprints (layer, text, board x,y; h text height)
P1: Mechanical 13 "PCB Edge" at -0.93,0.11 h1 r270; Mechanical 12 "PTH Slot 1.2 +/- 0.05 X 0.6 +/- 0.05" at 9.8,10.172 h0.5 r270